# EAGLE board encoder_board (EAGLE 9.6.2)
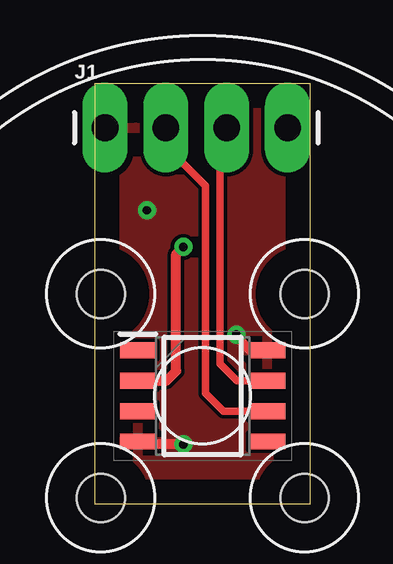
[diagram p0: board, top side]
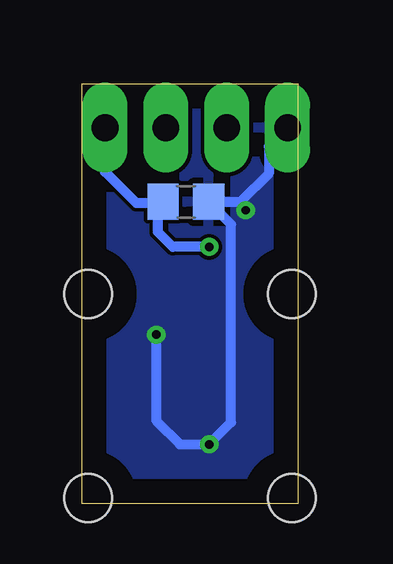
[diagram p1: board, bottom side, seen from below]

Size 9 x 17.5 mm. Coordinates in mm from the lower left corner, seen from the top.
Outline: 0,0 9,0 9,17.5 0,17.5 0,0
Copper layers (1*16): Top 0.035mm / dielectric 1.5mm / Bottom 0.035mm
Design rules "default": minimum track width 6mil, minimum drill 0.35mm, track to track 6mil, track to pad 6mil, pad to pad 6mil, via to via 6mil, smd to smd 6mil, copper to edge 40mil, drill to drill 6mil, minimum pad ring 10mil, minimum via ring 8mil, stop-mask expansion 4mil, vias tented up to drill 0mil, thermal gap 10mil

## Footprints (pad centres in the part's own frame; a part is rotated, then mirrored left to right if it is on the bottom)
C0805 = smd 1.3 x 1.5: 1 -0.95,0; 2 0.95,0
SOIC127P600X175-8N = smd 1.5 x 0.65: 1 -2.7,1.905; 2 -2.7,0.635; 3 -2.7,-0.635; 4 -2.7,-1.905; 5 2.7,-1.905; 6 2.7,-0.635; 7 2.7,0.635; 8 2.7,1.905
1X04_LONGPADS = drill 1.118 pad 1.88 long: 1 0,0; 2 2.54,0; 3 5.08,0; 4 7.62,0
BRUSHLESS_GIMBAL_MOTOR_2204 = hole 2: 4.25,4.25; -4.25,4.25; -4.25,-4.25; 4.25,-4.25

## Placement (x,y rotation side)
C1  100n  [C0805]  4.67,12.58 0 bottom
IC1  AS5600-ASOT  [SOIC127P600X175-8N]  4.5,4.5 0 top
J1  [1X04_LONGPADS]  0.43,15.68 0 top
U$1  [BRUSHLESS_GIMBAL_MOTOR_2204]  4.5,4.5 0 top

## Library data of the parts
C1 = rcl; SPICEPREFIX: C
IC1 = AS5600; DESCRIPTION: Board Mount Hall Effect / Magnetic Sensors AS5600 Magnetic Sensor 12-Bit; HEIGHT: 1.75mm; MANUFACTURER_NAME: ams; MANUFACTURER_PART_NUMBER: AS5600-ASOT; MOUSER_PART_NUMBER: 985-AS5600-ASOT; MOUSER_PRICE-STOCK: https://www.mouser.com/Search/Refine.aspx?Keyword=985-AS5600-ASOT
J1 = SparkFun-Connectors; PROD_ID: CONN-09696
U$1 = my_library

## Nets
GND: C1.2 IC1.4 IC1.8 J1.1
SCL: IC1.7 J1.3
SDA: IC1.6 J1.2
VCC: C1.1 IC1.2 J1.4

## Tracks (layer width: path | path; a pad name or v marks a point on that pad's centre or on a via)
GND  (via drill 0.35)
  Top 0.406: IC1.8 6.49,6.41 5.84,7.05 v5.91,7.05 | v3.7,2.48 1.91,2.48 IC1.4
  Bottom 0.406: J1.1 1.22,14.89 1.22,13.76 2.4,12.58 C1.2 2.79,11.65 2.79,3.4 v3.7,2.48 4.92,2.48 5.91,3.47 v5.91,7.05
  other vias: 2.18,12.24
  pour Bottom: -2.09,18.94 11.93,18.94 11.93,-2.39 -2.09,-2.39
  pour Top: -2.39,20.47 18.03,20.47 18.03,-3 -2.39,-3 -2.39,20.16
SCL
  Top 0.305: IC1.7 5.93,5.14 5.23,5.84 5.23,15.4 J1.3
SDA
  Top 0.305: IC1.6 5.37,3.86 4.62,4.62 4.62,13.26 2.97,14.91 J1.2
VCC  (via drill 0.35)
  Top 0.406: IC1.2 3,5.14 3.4,5.53 3.4,10.41 v3.7,10.71
  Bottom 0.406: J1.4 8.05,13.84 6.75,12.54 5.66,12.54 | 5.66,12.54 C1.1 | v3.7,10.71 5.23,10.71 5.84,11.32 5.84,12.37 5.66,12.54